# Altium PCB HU_SUPPORT_BOARD.PcbDoc (part 2 of 2)
Units mm, origin at the board's own origin, x right, y up, seen from the top; angles counter-clockwise.
Board outline 160 x 100 mm, 4 copper layers (Top Layer, Layer 1, Layer 2, Bottom Layer), stack 1.586 mm thick; 158 components, 113 nets, 591 pads, 28 vias.
Unrouted connection lines stored in the file: 303.
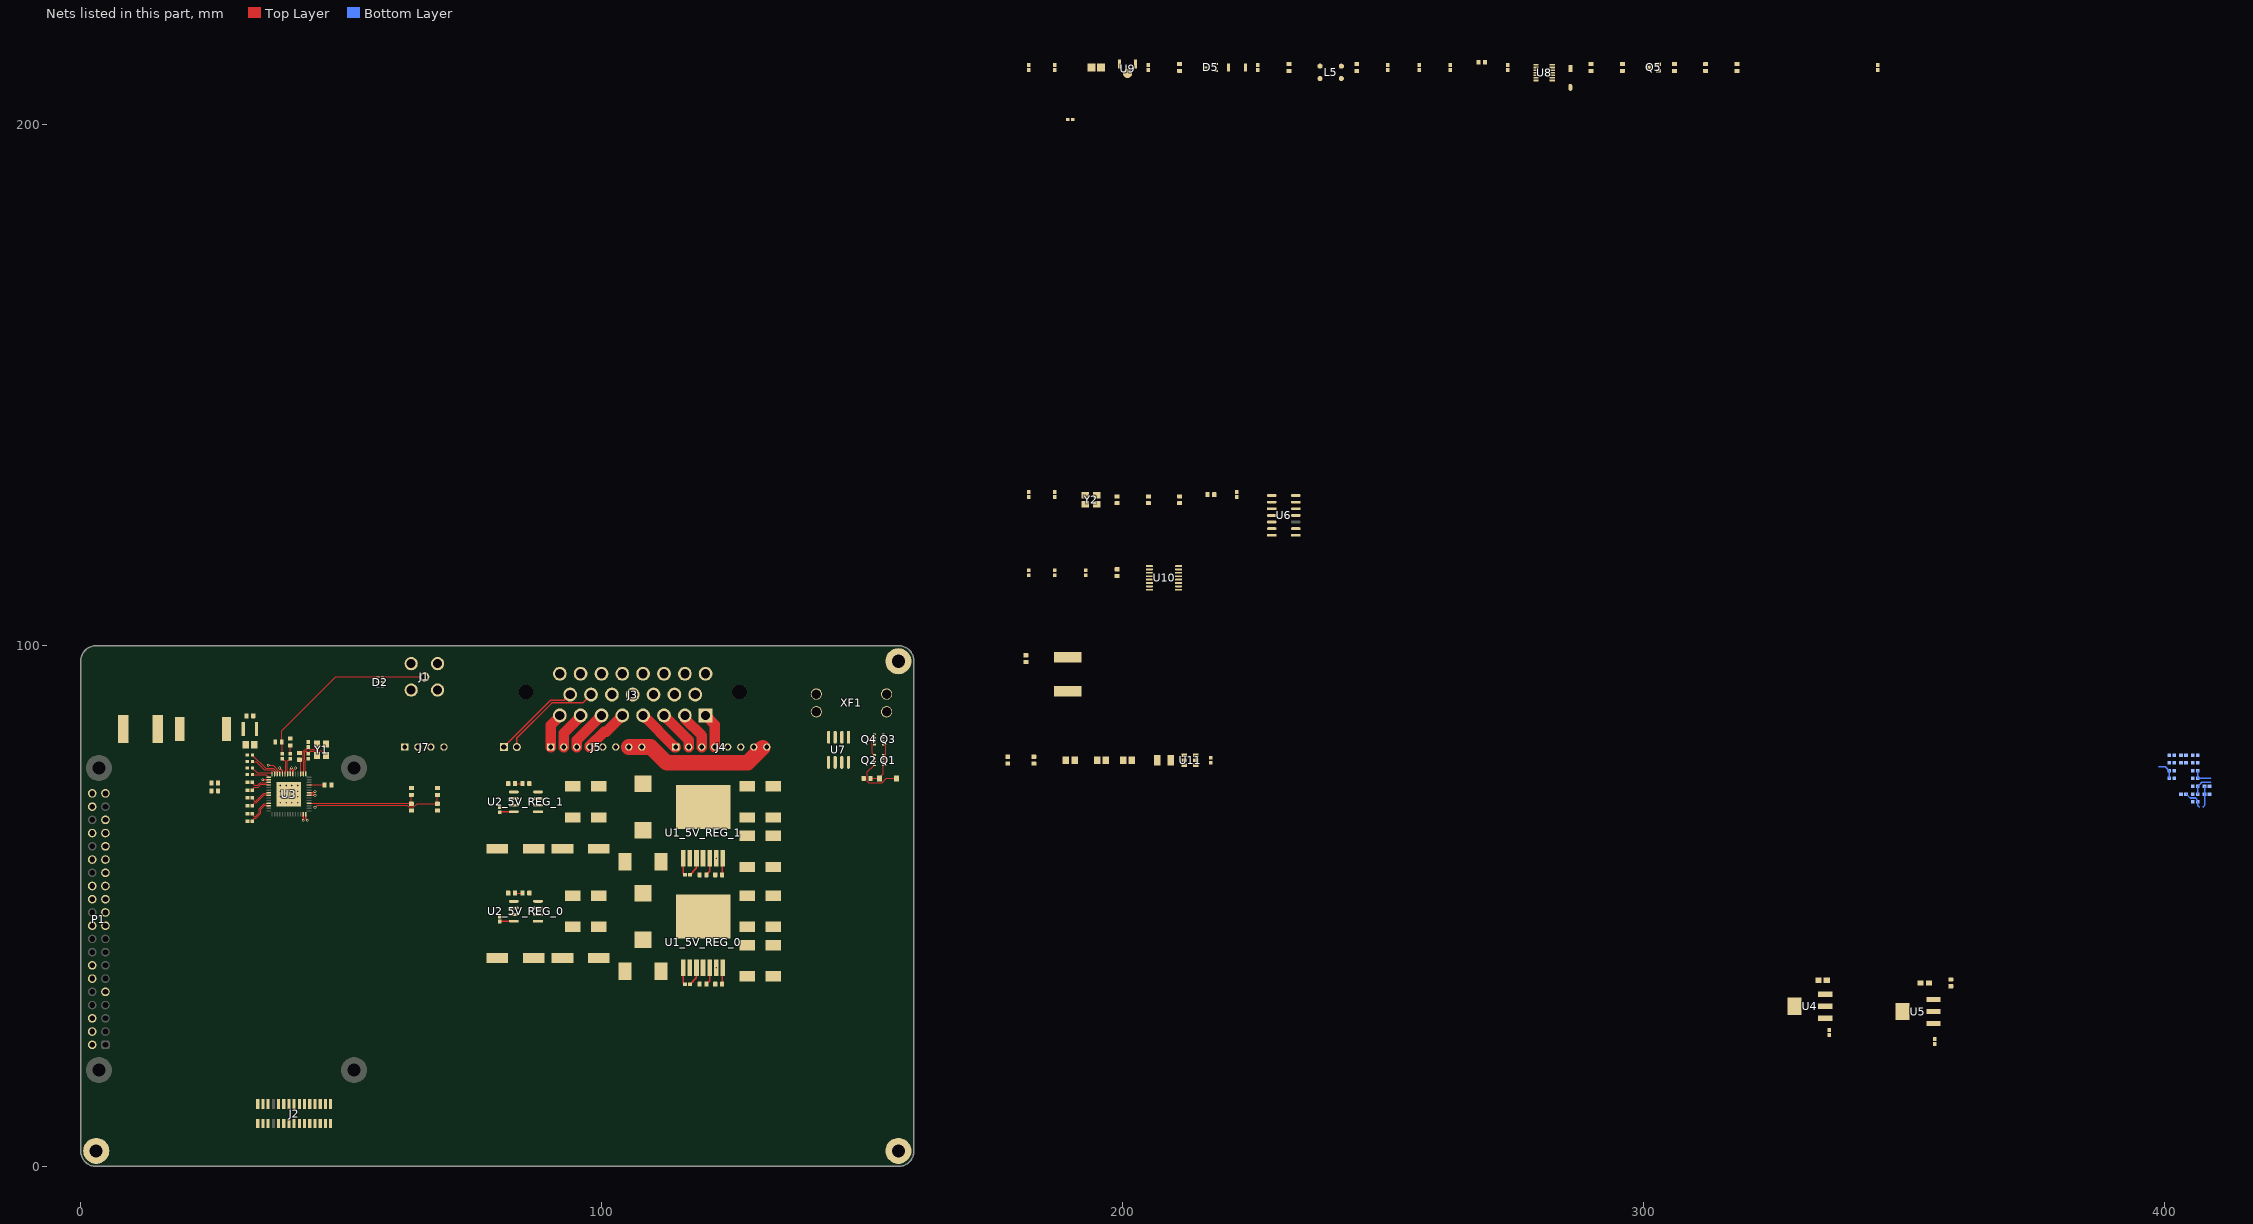
[diagram p2: the nets of this part, all layers, seen from the top]

## Part data (continued)
C22 C24: library part CMP-2006-02792-2, "Chip Multilayer Ceramic Capacitors for General Purpose, 0603, 10uF, X5R, 15%, 20%, 6.3V", Capacitance=10uF, Case Code (Imperial)=0603, Case Code (Metric)=1608, Dielectric=X5R, Max Operating Temperature=85°C, Min Operating Temperature=-55°C, Package Quantity=4000, Tolerance=20%, Voltage=6.3V, Case/Package=0603, Depth=0.8mm, Height=0.8mm, Lead Free="Lead Free", Length=1.6mm, Material=Ceramic, Mount="Surface Mount", Packaging="Tape and Reel", Radiation Hardening=No, REACH SVHC="No SVHC", Termination=SMD/SMT, Thickness=0.035inch, Voltage Rating=6.3V, Voltage Rating (DC)=6.3V, Width=0.031inch
C41 C59 C60 C61: library part CMP-2007-03222-3, "Chip Multilayer Ceramic Capacitors for General Purpose, 0805, 22uF, X5R, 15%, 20%, 25V", Capacitance=22uF, Case Code (Imperial)=0805, Case Code (Metric)=2012, Dielectric=X5R, Max Operating Temperature=85°C, Min Operating Temperature=-55°C, Package Quantity=3000, Resistor Type=Ceramic, Tolerance=20%, Voltage=25V, Case/Package=0805, Depth=1.25mm, Height=1.25mm, Lead Free="Lead Free", Length=2mm, Material=Ceramic, Mount="Surface Mount", Packaging="Tape and Reel", REACH SVHC="No SVHC", Termination=SMD/SMT, Thickness=0.057inch, Voltage Rating=25V, Voltage Rating (DC)=25V, Weight=0.000335oz, Width=1.25mm
C52: library part CMP-1036-04819-2, Manufacturer=Kemet, Part Number=C0805C225K9PACTU
D1_5V_REG_0 D1_5V_REG_1: library part CMP-2000-05097-3, "DIODE SCHOTTKY 40V 5A SMC", Capacitance=300pF, Forward Current=5A, Manufacturer="Diodes Inc.", Max Junction Temp=+150°C, Max Repetitive Reverse Voltage=40V, Max Surge Forward Current=100A, Package=SMC, Peak Reverse Current=0.5mA, Temperature="-55°C to +150°C", Temperature Range Low=-55°C, Automotive=No, Automotive Grade=NA, Category=Diode, ComponentLink2Description=Datasheet, ComponentLink2URL=https://www.diodes.com/assets/Datasheets/ds13012.pdf, Device Class L1="Discrete Semiconductors", Device Class L2=Diodes, Device Class L3="Schottky Diodes", Digikey Description="DIODE SCHOTTKY 40V 5A SMC", Footprint Url=https://www.diodes.com/assets/Package-Files/SMC.pdf, Height=2.5mm, Lead Free=Yes, Manufacturer Part Number=B540C-13-F, Mouser Description="Diode: Schottky rectifying; SMD; 40V; 5A; SMC; Package: reel, tape", Octopart=https://octopart.com/b540c-13-f-diodes+inc.-325873, Reverse Voltage=40V, RoHS=TRUE, Standoff Height=0.1mm, Temperature Range High=+150°C
D2: library part CMP-04989-000002-1, "4-CHANNEL LOW-CAPACITANCE SURGE", Ambient Temperature Range High=+125°C, Ambient Temperature Range Low=-40°C, Breakdown Voltage=5.5V, Capacitance=0.55pF, Clamping Voltage=11.5V, Manufacturer="Texas Instruments", Package=DQA0010A, Peak Pulse Current=5.5A, Peak Pulse Power=50W, Reverse Standoff Voltage=3.6V, Temperature="-40°C to +125°C", Automotive=No, Category=Diode, ComponentLink2Description=Datasheet, ComponentLink2URL=http://www.ti.com/lit/ds/symlink/esd204.pdf, Device Class L1="Circuit Protection", Device Class L2="TVS Diodes", Device Class L3=unset, Digikey Description="4-CHANNEL LOW-CAPACITANCE SURGE", Direction=Bidirectional, Height=0.55mm, Lead Free=Yes, Manufacturer Part Number=ESD204DQAR, Mouser Description="4-Channel Low-Capacitance Surge and ESD Protection Diode 10-USON -40 to 125", Number Of Channels=4, Octopart=https://octopart.com/esd204dqar-texas+instruments-89917476, RoHS=TRUE, Standoff Height=0mm, Temperature Range High=+125°C, Temperature Range Low=-40°C
D3: library part CMP-1060-00565-1, "Zener Voltage Regulator, 500 mW, 2-Pin SOD-123, Pb-Free, Tape and Reel", Manufacturer="On Semiconductor", ComponentLink1Description="Manufacturer URL", ComponentLink1URL=http://www.onsemi.com/, ComponentLink2Description=Datasheet, ComponentLink2URL=http://www.onsemi.com/pub_link/Collateral/MMSZ5221BT1-D.PDF, ComponentLink3Description="Package Specification", ComponentLink3URL=http://www.onsemi.com/pub_link/Collateral/425-04.PDF, DatasheetVersion="Rev. 12", Mounting Technology="Surface Mount", P Max (W)=0.5, PackageDescription="2-Pin SOD, Body 1.6 x 2.69 mm", PackageReference=SOD-123-2-425-04, PackageVersion="Rev. G, 10/2009", Packing="Tape and Reel", PartNumber=MMSZ5242BT1G, RoHS=Pb-Free, VZ Typ (V)=12
D4: library part CMP-2000-04993-2, "DIODE GEN PURP 100V 150MA SOD123", Average Rectified Current=150mA, Capacitance=4pF, Forward Voltage=1V, Max Forward Surge Current (Ifsm)=1A, Max Operating Temperature=150°C, Max Repetitive Reverse Voltage (Vrrm)=100V, Max Reverse Leakage Current=5uA, Max Surge Current=2A, Min Operating Temperature=-65°C, Package Quantity=3000, Power Dissipation=400mW, Current Rating=150mA, Element Configuration=Single, Forward Current=150mA, Height=1.2mm, Lead Free="Lead Free", Length=2.85mm, Max Reverse Voltage (DC)=100V, Mount="Surface Mount", Number of Pins=2, Output Current=150mA, Packaging="Tape and Reel", Peak Non-Repetitive Surge Current=2A, Polarity=Standard, Radiation Hardening=No, Recovery Time=4ns, Reverse Recovery Time=4ns, Voltage Rating (DC)=100V, Width=1.8mm
D5: library part CMP-12225-000055-1, "TVS DIODE 26.5V 44V SOT323-3", Breakdown Voltage=28.5V, Capacitance=3pF, Clamping Voltage=44V, Manufacturer=STMicroelectronics, Max Junction Temp=+175°C, Package=SOT323-3L, Peak Pulse Current=3A, Peak Pulse Power=170W, Reverse Standoff Voltage=26.5V, Temperature="-55°C to +175°C", Temperature Range Low=-55°C, Automotive=Yes, Automotive Grade="Grade 0", Category=Diode, ComponentLink2Description=Datasheet, ComponentLink2URL=https://www.st.com/resource/en/datasheet/esdcan02-2bwy.pdf, Device Class L1="Circuit Protection", Device Class L2="TVS Diodes", Device Class L3=unset, Digikey Description="TVS DIODE 26.5V 44V SOT323-3", Direction=Bidirectional, Height=1.1mm, Ipc Land Pattern Name=SOT65P210X95-3, Lead Free=Yes, Manufacturer Part Number=ESDCAN02-2BWY, Mouser Description="TVS Diodes / ESD Suppressors Automotive dual-line Transil, Transient voltage suppressor (TVS) for CAN bus", Number Of Channels=2, Octopart=https://octopart.com/esdcan02-2bwy-stmicroelectronics-58631133, RoHS=TRUE, Standoff Height=0mm, Temperature Range High=+175°C
F1 F2: library part CMP-08606-000071-1, "PTC RESET FUSE 60V 500MA 2920", Case Code (Imperial)=2920, Case Code (Metric)=7351, Current Rating=10A, Hold Current=500mA, Max Operating Temperature=85°C, Max Voltage Rating (DC)=60V, Min Operating Temperature=-40°C, Package Quantity=1500, Power Dissipation=1.5W, Resistance=1.4R, Trip Current=1A, Approvals=cULus, Case/Package=2920, Height=1.25mm, Lead Free="Lead Free", Length=7.98mm, Max Current Rating=10A, Operating Supply Voltage=60V, Packaging="Tape and Reel", REACH SVHC="No SVHC", RoHS Compliant=Yes, Series=2920L, Terminal Material=Copper, Termination=SMD/SMT, Time to Trip=4s, Voltage Rating=60V, Voltage Rating (DC)=60V, Width=5.44mm, Working Voltage=60V
J1: library part CMP-002-00054-1, "RF F Connector, Male, Board Mount, Solder Terminal, Plug", Connector Type="RF F CONNECTOR", Mounting Technology=Board, RoHS Compliant=Yes
J2: library part CMP-03368-000001-1, "CONN FPC VERT 15POS 1.00MM SMD", Current Rating=1A, Manufacturer=TE, Package=0, Temperature="-20°C to +85°C", Temperature Range High=+85°C, Temperature Range Low=-20°C, Voltage Rating=125V, Automotive=No, Category=Conn, ComponentLink2Description=Datasheet, ComponentLink2URL=https://www.te.com/commerce/DocumentDelivery/DDEController?Action=showdoc&DocId=Customer+Drawing%7F1734248%7FE1%7Fpdf%7FEnglish%7FENG_CD_1734248_E1__.pdf%7F1-1734248-5, Conn Gender=Female, Conn Orientation=Vertical, Contact Material=Gold,Nickel, Device Class L1=Connectors, Device Class L2="FFC / FPC", Device Class L3=unset, Digikey Description="CONN FPC VERT 15POS 1.00MM SMD", Height=8mm, Is Female=yes, Lead Free=Yes, Manufacturer Part Number=1-1734248-5, Mounting Type="Surface Mount", Mouser Description="FFC & FPC Connectors 15P 1.0 FPC, Zip V/T SMT", Number of Contacts=15, Octopart=https://octopart.com/1-1734248-5-te+connectivity-40620898, Pitch=1mm, RoHS=TRUE
J3: library part CMP-03369-000157-2, "CONN HEADER R/A 23POS 4MM", Color=Black, Current Rating=17A, Flammability Rating="UL94 V-0", Max Operating Temperature=221°C, Max Voltage Rating (AC)=250V, Min Operating Temperature=-40°C, Package Quantity=1, Circuit Application=Power, Connector System=Wire-to-Device, Connector Type=Header, Contact Finish - Mating=TIN, Contact Material=Brass, Contact Plating=Tin, Contact Shape=Circular, Contact Type="Male Pin", Depth=37.9mm, ELV=Compliant, Fastening Type=Ramp, Gender=Male, Housing Color=Black, Housing Material=Polybutylene, Insulation Color=Black, Insulation Material=PBT, Lead Free="Lead Free", Length=60.8mm, Mount="Through Hole", Number of Contacts=23, Number of Ports=1, Number of Positions=23, Number of Rows=3, Number of Signal Positions=23, Number of Terminals/Pins=23, Orientation="Right Angle", Packaging=Bulk, PCB Mount Alignment="Yes (With)", PCB Mount Retention=With, PCB Thickness=0.062inch, Pitch=0.157inch, Primary Type=Rectangular, Radiation Hardening=No, RoHS Compliant=Yes, Row Spacing=0.157inch, Sealable="Yes (With)", Series=Ampseal, Shielding=Unshielded, Tab Thickness=1.3mm, Termination=Solder, Voltage Rating (AC)=250V, Width=37.9mm
J4 J5: library part CMP-17438-000015-1, "CONN HEADER VERT 8POS 2.5MM", Color=Natural, Contact Resistance=20mR, Current Rating=3A, Housing Color=White, Insulation Resistance=1GR, Max Operating Temperature=85°C, Max Voltage Rating (AC)=250V, Min Operating Temperature=-25°C, Connector Type="Male Pin", Contact Material=Brass, Contact Plating=Tin, Contact Type="Male Pin", Depth=5.75mm, Fastening Type=Detent, Housing Material=Polyamide, Lead Free="Lead Free", Lead Pitch=2.5mm, Length=22.4mm, Max Current Rating=3A, Mount="Through Hole", Number of Contacts=8, Number of Positions=8, Number of Rows=1, Orientation=Straight, Packaging=Bulk, Pitch=2.5mm, REACH SVHC="No SVHC", Series=XH, Termination=Press-Fit, Voltage Rating=250V, Voltage Rating (AC)=250V, Wire/Cable Gauge=22AWG
J6: library part CMP-2000-05888-3, "CONN HEADER VERT 2POS 2.5MM", Color=Natural, Contact Resistance=20mR, Current Rating=3A, Housing Color=White, Insulation Resistance=1GR, Max Operating Temperature=85°C, Max Voltage Rating (AC)=250V, Min Operating Temperature=-25°C, Connector Type="Male Pin", Contact Material=Brass, Contact Plating=Tin, Contact Type="Male Pin", Depth=5.75mm, Fastening Type=Detent, Housing Material=Polyamide, Lead Free="Lead Free", Lead Pitch=2.5mm, Length=7.4mm, Max Current Rating=3A, Max Voltage Rating (DC)=250V, Mount="Through Hole", Number of Contacts=2, Number of Positions=2, Number of Rows=1, Orientation=Straight, Packaging=Bulk, Pitch=2.5mm, REACH SVHC="No SVHC", Series=XH, Termination=Solder, Voltage Rating=250V, Voltage Rating (AC)=250V, Wire/Cable Gauge=22AWG
J7: library part CMP-17439-000250-1, "CONN HEADER VERT 4POS 2.5MM", Color=Natural, Contact Resistance=20mR, Current Rating=3A, Flammability Rating="UL94 V-0", Housing Color=White, Insulation Resistance=1GR, Max Operating Temperature=85°C, Max Voltage Rating (AC)=250V, Min Operating Temperature=-25°C, Package Quantity=500, Connector Type=Header, Contact Finish - Mating=TIN, Contact Material=Brass, Contact Plating=Tin, Contact Shape=Square, Contact Type="Male Pin", Depth=5.75mm, Fastening Type=Detent, Gender=Male, Housing Material=Polyamide, Insulation Color=Natural, Insulation Material=Nylon, Lead Free="Lead Free", Lead Pitch=2.5mm, Length=12.4mm, Mated Stacking Heights=9.8mm, Material=Polyamide, Max Current Rating=3A, Max Voltage Rating (DC)=250V, Mount="Through Hole", Number of Contacts=4, Number of Positions=4, Number of Rows=1, Orientation=Straight, Packaging=Bulk, Pitch=2.5mm, REACH SVHC="No SVHC", Series=XH, Termination=Solder, Voltage Rating=250V, Voltage Rating (AC)=250V, Wire/Cable Gauge=22AWG
L1_5V_REG_0 L1_5V_REG_1: library part CMP-02424-000785-1, "Commercial Inductors, Low DCR Series 22uH 5A 66mΩ 20%", Case/Package=4040, Current Rating=5A, DC Resistance (DCR)=66mR, Inductance=22uH, Inductance Tolerance=20%, Max DC Current=4.5A, Max Operating Temperature=125°C, Min Operating Temperature=-55°C, Package Quantity=1, Self Resonant Frequency=1MHz, Test Frequency=100kHz, Contact Plating=Tin, Core Material=Metal, Depth=10.3mm, Height=4mm, Height - Seated (Max)=0.157inch, Lead Free="Lead Free", Length=0.43inch, Military Standard=Not, Mount="Surface Mount", Packaging="Tape and Reel", Radiation Hardening=No, Rated Current-Max=5A, RMS Current (Irms)=5A, RoHS Compliant=Yes, Saturation Current=4.5A, Series=IHLP-4040DZ-11, Shielding=Shielded, Termination=SMD/SMT, Tolerance=20%, Width=0.405inch
L2: library part CMP-0227-00094-3, Ambient Temperature Range High=95°C, Ambient Temperature Range Low=-40°C, Case/Package=Nonstandard, Current Rating=1.2A, DC Resistance (DCR)=255mΩ, Inductance=100µH, Inductance Tolerance=30%, Max Operating Temperature=125°C, Self Resonant Frequency=6MHz, Test Frequency=100kHz, Composition=Wirewound, Core Material=Ferrite, Depth=10mm, Height=3.8mm, Height - Seated (Max)=4.0894mm, Length=10mm, Max DC Current=1.2A, Min Operating Temperature=-40°C, Mount="Surface Mount", NexarPartId=8917123, Number of Pins=2, Packaging="Cut Tape (CT)", REACH SVHC=Unknown, Resistance=255mΩ, RMS Current (Irms)=1.2A, RoHS=Compliant, Saturation Current=1.2A, Shielding=Shielded, Termination=SMD/SMT, Tolerance=30%, Weight=1.273007g, Width=10mm
L3: library part CMP-11268-000041-1, "NOT COILCRAFT - ACTUAL P# --> ADL32VHC-220M /  - Power Injection Chokes for PoC", Ambient Temperature Range High=+125°C, Ambient Temperature Range Low=-40°C, Inductance=22uH, Manufacturer=coilcraft, Manufacturer Part Number=1210POC-223MRC, Package=1210POC, Rms Current=700mA, Saturation Current=720mA, Self Resonant Frequency=70MHz, Series Resistance=0.88Ω, Test Frequency=100kHz, Tolerance=20%, Automotive=Yes, Automotive Grade="Grade 1", Category=Ind, ComponentLink2Description=Datasheet, ComponentLink2URL=https://drive.google.com/open?id=15FlOq8Y4YbRFohfA_cJ40jgnqs8va2Mh, Core Material=Ferrite, Device Class L1="Passive Components", Device Class L2=Inductors, Device Class L3="Fixed Inductors", Height=3mm, Lead Free=Yes, Octopart=https://octopart.com/1210poc-223mrc-coilcraft-103207315, RoHS=TRUE
L4: library part CMP-11268-000007-1, "Fixed Inductors PFL1609 Low Profile 0.56 uH 20 % 1.4 A", Ambient Temperature Range High=+105°C, Ambient Temperature Range Low=-40°C, Inductance=0.56uH, Manufacturer=coilcraft, Package=PFL1609, Rms Current=1100mA, Saturation Current=710mA, Self Resonant Frequency=600MHz, Series Resistance=130mΩ, Test Frequency=7.9MHz, Tolerance=20%, Automotive=Yes, Automotive Grade="Grade 1", Category=Ind, ComponentLink2Description=Datasheet, ComponentLink2URL=https://www.coilcraft.com/pdfs/pfl1609.pdf, Composition=Wirewound, Core Material=Composite, Device Class L1="Passive Components", Device Class L2=Inductors, Device Class L3="Fixed Inductors", Height=0.95mm, Lead Free=Yes, Manufacturer Part Number=PFL1609-561MEW, Mouser Description="Fixed Inductors PFL1609 Low Profile 0.56 uH 20 % 1.4 A", Octopart=https://octopart.com/pfl1609-561mew-coilcraft-20329171, RoHS=TRUE, Shielding=true
L5: library part CMP-07251-000006-1, "CMC 51UH 200MA 2LN 2KOHM SMD", Case/Package=4532, Current=200mA, DC Resistance (DCR)=3.5R, Inductance=51uH, Insulation Resistance=10MR, Max Operating Temperature=125°C, Min Operating Temperature=-40°C, Package Quantity=1, Resistance=2kR, Self Resonant Frequency=100kHz, Tolerance=50%, Voltage Rating (DC)=50V, Contact Plating=Tin, Core Material=Ferrite, Current Rating=200mA, DC Current=200mA, Depth=3.4mm, Element Configuration=Dual, Height=0.118inch, Impedance=2kR, Lead Free="Lead Free", Length=4.5mm, Material=Steel, Max DC Current=200mA, Mount="Surface Mount", Number of Lines=2, Packaging="Tape and Reel", REACH SVHC="No SVHC", RoHS Compliant=Yes, Series=SRF4532, Termination=SMD/SMT, Test Frequency=100kHz, Width=0.126inch
L6: library part CMP-06042-015002-1, "Wire Wound Ferrite Inductor for Power Lines 4.7μH ±30% 0.216Ω 1000mA 1210", Case Code (Imperial)=1210, Case Code (Metric)=3225, Current Rating=1A, DC Resistance (DCR)=180mR, Inductance=4.7uH, Inductance Tolerance=30%, Max Operating Temperature=85°C, Min Operating Temperature=-40°C, Package Quantity=2000, Resistor Type=Wirewound, Self Resonant Frequency=40MHz, Test Frequency=1MHz, Case/Package=1210, Core Material=Ferrite, DC Current=1A, Depth=2.8mm, Height=2mm, Height - Seated (Max)=0.067inch, Lead Free="Lead Free", Length=3.2mm, Max DC Current=1A, Military Standard=Not, Mount="Surface Mount", Packaging="Tape and Reel", Radiation Hardening=No, REACH SVHC="No SVHC", Saturation Current=1A, Shielding=Shielded, Termination=SMD/SMT, Tolerance=30%, Weight=0.001552oz, Width=0.098inch
P1: library part CMP-1502-01135-3, Color=Black, Contact Resistance=20mΩ, Current Rating=3A, Max Operating Temperature=105°C, Min Operating Temperature=-40°C, Operating Supply Voltage=250V, Connector Type="Male Pin", Contact Material=Copper, Contact Mating Length=5.9944mm, Contact Plating=Gold, Gender=Male, Height=8.89mm, Lead Pitch=2.54mm, Mount="Through Hole", NexarPartId=32855579, Number of Contacts=40, Number of Pins=40, Number of Positions=40, Number of Rows=2, Orientation=Vertical, Packaging=Bulk, Pitch=2.54mm, REACH SVHC=Unknown, RoHS=Compliant, Row Spacing=2.54mm, Termination=Solder, Voltage Rating=250V
Q1 Q2 Q3 Q4: library part CMP-013-00018-2, "Trans MOSFET P-CH 20V 22.1A 8-Pin PowerPAK 1212 EP T/R", Component Type=Standard, Design Item ID=CMP-013-00036-4, Pins=5, Source=SISH615ADN-T1-GE3.SchLib
Q5: library part CMP-2000-05968-1, "N-Channel Enhancement Mode Mosfet, 50 V, 200 mA, -55 to 150 degC, 6-Pin SOT-323, RoHS, Tape and Reel", Id - Continuous Drain Current=200mA, Manufacturer=DiodesIncorporated, Maximum Operating Temperature=+150C, Minimum Operating Temperature=-55C, Package / Case=SOT-323-3, Package Description="3-Pin Small Outline Transistor, Body 2 x 1.25 mm, Pitch 0.65 mm", Package Reference=SOT323, Pd - Power Dissipation=200mW, Rds On - Drain-Source Resistance=1.4Ohms, Vds - Drain-Source Breakdown Voltage=75V, Vgs - Gate-Source Voltage=20V, Brand=DiodesIncorporated, Channel Mode=Enhancement, Configuration=Single, Datasheet URL=http://www.diodes.com/_files/datasheets/ds30206.pdf, Datasheet Version="Rev. 11-2, 09/2013", Factory Pack Quantity=3000, Forward Transconductance - Min=0.1S, Height=1mm, Length=2.2mm, Manufacturer URL=http://www.diodes.com/, Mounting Style=SMD/SMT, Mounting Technology=SurfaceMount, Number Of Channels=1Channel, Packaging=Reel, Product=MOSFETSmallSignal, Product Category=MOSFET, RoHS=True, Series=BSS138, Technology=Si, Transistor Polarity=N-Channel, Transistor Type=1N-Channel, Type=EnhancementModeFieldEffectTransistor, Typical Turn-Off Delay Time=20ns, Typical Turn-On Delay Time=20ns, Unit Weight=0.000212oz, Width=1.35mm
R1 R8 R9 R11 R12: library part CMP-009-00118-2, "READ THE NAME", Component Type=Standard, Design Item ID=CMP-009-00206-2, Pins=2, Source=0402jump.SchLib
R2_5V_REG_0 R2_5V_REG_1 R3_5V_REG_0 R3_5V_REG_1 R4_5V_REG_0 R4_5V_REG_1 R5_5V_REG_0 R5_5V_REG_1 R6 R7 R10 R13 R14 R15 R16 R17 R18 R19 R20 R21 R22 R23 R24 R25 R26 R27 R28 R29 R30 R31 R32 R33 R34 R35 R36 R37 R38: library part CMP-009-00002-14, "Resistor"
SW1: library part CMP-10040-000029-1, "SWITCH TACTILE SPST-NO 0.02A 15V", Current Rating=5A, Flammability Rating="UL94 V-0", Insulation Color=Black, Max Operating Temperature=85°C, Min Operating Temperature=-40°C, Operating Force=240gf, Actuator Type=Standard, Connector Type=USB, Contact Plating=Gold, Gender=Receptacle, Illumination Type=Non-Illuminated, Mechanical Life=500000Cycles, Mount="Surface Mount", Number of Contacts=24, Number of Ports=1, Packaging="Tape and Reel", Switch Function=Off-Mom, Switch Travel=0.13mm, Termination=Solder, Throw Configuration=SPST
U1_5V_REG_0 U1_5V_REG_1: library part CMP-0069-00189-3, "SIMPLE SWITCHER® High Efficiency 5A Step-Down Voltage Regulator, 7-pin TO-263, Pb-Free", Manufacturer="Texas Instruments", PackageTopMarking=NSUZXYTTE#*LM2678*S-5.0, PowerWise=N, Code_JEDEC=MO-169-AC, ComponentLink1Description="Datasheet URL", ComponentLink1URL=http://www.ti.com/general/docs/lit/getliterature.tsp?genericPartNumber=LM2678&fileType=pdf, CompType=Switcher, PackageDescription="TO-263, Molded, .400 x .390 x .180in Body, 7 Lead, .050in Pitch, Surface Mount", PackageReference=KTW0007B, PinCount=7, RoHS=Y
U2_5V_REG_0 U2_5V_REG_1: library part CMP-1557-00012-2, "SENSOR CURRENT HALL 12.5A AC/DC", Case/Package=SOIC, Current Sensing=12.5A, Frequency=100kHz, Max Operating Temperature=125°C, Max Supply Current=5.5mA, Max Supply Voltage=5.5V, Min Operating Temperature=-40°C, Min Supply Voltage=3V, Operating Supply Voltage=3.3V, Package Quantity=1, Quiescent Current=4mA, -3db Bandwidth=100kHz, Accuracy=5%, Bandwidth=100kHz, Height=1.5mm, Length=4.9mm, Linearity=1%, Number Of Channels=1, Number of Pins=8, Packaging="Tape and Reel", Polarity=Bidirectional, REACH SVHC="No SVHC", Response Time=4.6us, RoHS Compliant=Yes, Sensitivity=110mV/A, Series=-, Width=3.9mm
U3: library part CMP-015-00011-3, "Quad Tunneling GMSL2/1 to CSI-2 Deserializer"
U4: library part CMP-0244-00308-1, "Fixed Low Drop Positive Voltage Regulator, 1.8V, 4-Pin SOT-223, Tape and Reel", ComponentLink1Description="Manufacturer URL", ComponentLink1URL=http://www.st.com, ComponentLink2Description=Datasheet, ComponentLink2URL=http://www.st.com/internet/com/TECHNICAL_RESOURCES/TECHNICAL_LITERATURE/DATASHEET/CD00000544.pdf, DatasheetVersion=1/11/2011, PackageDescription="4-Pin SOT-223 Package, 6.5 x 3.5 mm Body, 2.3 mm Pitch, 7 mm Lead Span", PackageReference=SOT-223, PackageVersion=2010
U5: library part CMP-0244-00318-1, "Fixed Low Drop Positive Voltage Regulator, 1.2V, 4-Pin SOT-223, Tape and Reel", ComponentLink1Description="Manufacturer URL", ComponentLink1URL=http://www.st.com, ComponentLink2Description=Datasheet, ComponentLink2URL=http://www.st.com/internet/com/TECHNICAL_RESOURCES/TECHNICAL_LITERATURE/DATASHEET/CD00000544.pdf, DatasheetVersion=1/11/2011, PackageDescription="4-Pin SOT-223 Package, 6.5 x 3.5 mm Body, 2.3 mm Pitch, 7 mm Lead Span", PackageReference=SOT-223, PackageVersion=2010
U6: library part CMP-06298-000019-1, "IC CAN CONTROLLER SPI 14SOIC", RoHS Compliant=Yes
U7: library part CMP-1557-00015-2, "SENSOR CURRENT HALL 25A AC/DC", Case/Package=SOIC, Current Sensing=25A, Frequency=100kHz, Max Operating Temperature=125°C, Max Supply Current=5.5mA, Max Supply Voltage=5.5V, Min Operating Temperature=-40°C, Min Supply Voltage=3V, Operating Supply Voltage=3.3V, Package Quantity=1, Quiescent Current=4mA, -3db Bandwidth=100kHz, Accuracy=4%, Bandwidth=100kHz, Height=1.5mm, Length=4.9mm, Linearity=1%, Number Of Channels=1, Number of Pins=8, Packaging="Tape and Reel", Polarity=Bidirectional, REACH SVHC="No SVHC", Response Time=4.6us, RoHS Compliant=Yes, Sensitivity=55mV/A, Series=-, Width=3.9mm
U8: library part CMP-318-000000-2, "Automotive CAN FD transceiver with watchdog, bus diagnostics and partial networking via sele 14-SOT-23-THIN -40 to 150", Component Type=Standard, Design Item ID=CMP-015-00012-2, Pin Count=14, Source=TCAN1146DYYRQ1.SchLib
U9: library part CMP-12756-000009-1, "IC REG LINEAR 5V 150MA SOT89", Ambient Temperature Range High=+85°C, Ambient Temperature Range Low=-40°C, Dropout Voltage=1000mV, Manufacturer="Diodes Inc.", Max Junction Temp=+125°C, Max Supply Voltage=40V, Min Supply Voltage=3.3V, Nominal Supply Current=2.5-25uA, Output Current=150mA, Output Voltage=5V, Package=SOT89, Temperature="-40°C to +125°C", Automotive=No, Category=IC, ComponentLink2Description=Datasheet, ComponentLink2URL=https://www.diodes.com/assets/Datasheets/AP7381.pdf, Device Class L1="Integrated Circuits (ICs)", Device Class L2="Power Management ICs", Device Class L3="Voltage Regulators - Linear", Digikey Description="IC REG LINEAR 5V 150MA SOT89", Footprint Url=https://www.diodes.com/assets/Package-Files/SOT89.pdf, Height=1.6mm, Lead Free=Yes, Manufacturer Part Number=AP7381-50Y-13, Number Of Outputs=1, Octopart=https://octopart.com/ap7381-50y-13-diodes+inc.-87775116, Output Type=Fixed, RoHS=TRUE, Temperature Range High=+125°C, Temperature Range Low=-40°C
U10: library part CMP-0054-00372-2, "8-Channel, 50 kSPS to 200 kSPS, 8-Bit A/D Converter, 16-pin TSSOP, Pb-Free", Manufacturer="National Semiconductor", PackageTopMarking=NSUZXYTT*88S022*CIMT, PowerWise=Y, Code_JEDEC=MO-153-AB, ComponentLink1Description="ADC088S022 Datasheet", ComponentLink1URL=http://www.national.com/ds/AD/ADC088S022.pdf, ComponentLink2Description="ADC088S022 Web Page", ComponentLink2URL=http://www.national.com/pf/AD/ADC088S022.html, ComponentLink3Description="MTC16 Package Page", ComponentLink3URL=http://www.national.com/packaging/folders/mtc16.html, CompType="ADC IC", DatasheetVersion=Feb-2010, PackageDescription="Molded TSSOP, Jedec, 5 x 4.4 x 0.9mm Body, 16 Lead, 0.65mm Pitch", PackageReference=MTC16, PackageVersion="revD, Jun-2003", PinCount=16, RevisionNote="Component URLs added", RoHS=Y
U11: library part CMP-12757-000006-1, "IC REG BUCK 3.3V 2A TSOT26", Ambient Temperature Range High=+85°C, Ambient Temperature Range Low=-40°C, Manufacturer="Diodes Inc.", Max Junction Temp=+160°C, Max Supply Voltage=32V, Min Supply Voltage=3.8V, Nominal Supply Current=22uA, Output Current=2A, Output Voltage=3.3V, Package=TSOT26, Switching Frequency=1.1MHz, Temperature="to +160°C", Automotive=No, Category=IC, ComponentLink2Description=Datasheet, ComponentLink2URL=https://www.diodes.com/assets/Datasheets/AP63200-AP63201-AP63203-AP63205.pdf, Device Class L1="Integrated Circuits (ICs)", Device Class L2="Power Management ICs", Device Class L3="Voltage Regulators - Switching", Digikey Description="IC REG BUCK 3.3V 2A TSOT26", Footprint Url=https://www.diodes.com/assets/Package-Files/TSOT26.pdf, Height=1mm, Lead Free=Yes, Manufacturer Part Number=AP63203WU-7, Mouser Description="AP63203 Series 3.3 V 2 A SMT Fixed Low IQ Synchronous Buck - TSOT-26", Number Of Outputs=1, Octopart=https://octopart.com/ap63203wu-7-diodes+inc.-98099550, Output Type=Fixed, RoHS=TRUE, Standoff Height=0.01mm, Switching Topology=Buck, Temperature Range High=+160°C
XF1: library part CMP-2000-05461-1, "FUSE HOLDER, PCB MOUNT, 500VAC, 20A, ROHS", Current Rating=30A, Manufacturer=Keystone-Electronics, Voltage=500V, Category=CircuitProtection, Contact Finish=TinNickel, Contact Material=Brass, Datasheet URL=http://datasheet.octopart.com/3557-2-Keystone-datasheet-15715937.pdf, Datasheet Version=Apr-13, Family=Fuseholders, For Use With/Related Products=ATC,ATO257,MINI897, Fuse Size="0.43\"Lx0.15\"Wx0.64\"H(10.92mmx3.81mmx16.25mm)", Fuse Type=Blade, Fuseholder Type=Block, Manufacturer URL=http://www.keyelco.com/, Mounting Type=PCB, Number of Circuits=1, Orientation=Vertical, Series=-, Termination Style=PCPin
Y1: library part CMP-2000-05733-3, "Crystal 25MHz ±20ppm (Tol) ±30ppm (Stability) 18pF FUND 60Ω 4-Pin SMD T/R", Case/Package=CSMD, ESR (Equivalent Series Resistance)=60R, Frequency=25MHz, Frequency Stability=30ppm, Frequency Tolerance=20ppm, Load Capacitance=18pF, Max Operating Temperature=85°C, Min Operating Temperature=-40°C, Operating Frequency="25 MHz", Package Quantity=1000, Depth=2.5mm, Height=0.039inch, Lead Free="Lead Free", Length=3.2mm, Mount="Surface Mount", Number of Pins=4, Packaging="Tape and Reel", Radiation Hardening=No, Series=ABM8G, Series Resistance=60R, Termination=SMD/SMT, Tolerance=20ppm, Width=0.098inch
Y2: library part CMP-27762-015817-1, "Crystal 20MHz ±20ppm (Tol) ±30ppm (Stability) 18pF FUND 80Ω 4-Pin SMD T/R", Case/Package=CSMD, ESR (Equivalent Series Resistance)=80R, Frequency=20MHz, Frequency Stability=30ppm, Frequency Tolerance=20ppm, Load Capacitance=18pF, Max Operating Temperature=85°C, Min Operating Temperature=-40°C, Package Quantity=1000, Depth=2.5mm, Height=1mm, Length=3.2mm, Mount="Surface Mount", Number of Pins=4, Packaging="Tape and Reel", Series=ABM8G, Termination=SMD/SMT, Tolerance=20ppm, Width=2.5mm

## Free pads (board coordinates)
  round 5 hole 2.5: 29(3,3) 29(3.5,18.5) 29(3.5,76.5) 29(52.5,18.5) 29(52.5,76.5) 29(157,3) 29(157,97)

## Via types
v1: diameter 0.5, hole 0.3, Top Layer to Bottom Layer, 16 vias
v2: diameter 0.5, hole 0.3, Top Layer to Bottom Layer, tented both sides, 12 vias

## Nets (pads, with @x,y where several pads share a name; then routed paths per layer and width w, separated by ;. In a path a pad name is that pad's centre, name@x,y a point inside that pad or via, vN(x,y) a via of type N, cw(c..) or ccw(c..) an arc to the next point about the centre after c; other vN are vias at no path point)
3V3: C10_5V_REG_0.2 C10_5V_REG_1.2 C21.2 C23.2 C42.1 C45.1 C47.1 C55.1 C60.2 C61.2 L6.2 R1.2 R2_5V_REG_0.2 R6.2 R7.2 R13.2 R15.2 R16.2 R21.1 R22.1 R23.1 R35.1 R36.2 U2_5V_REG_0.8 U2_5V_REG_1.8 U4.3 U5.3 U6.14 U7.8 U8.5 U10.2 U11.1 | length 5.4
  Top Layer w0.3: C10_5V_REG_0.2@80.5,47.021 80.574,47.095 U2_5V_REG_0.8@83.184,47.095 ; C10_5V_REG_1.2@80.5,68.021 80.574,68.095 U2_5V_REG_1.8@83.184,68.095
5V_FB_5V_REG_0: C6_5V_REG_0.2 C7_5V_REG_0.2 C8_5V_REG_0.2 C9_5V_REG_0.2 L1_5V_REG_0.2 U1_5V_REG_0.6 U2_5V_REG_0.1 U2_5V_REG_0.2
  other v2: 122.04,38.15
5V_FB_5V_REG_1: C6_5V_REG_1.2 C7_5V_REG_1.2 C8_5V_REG_1.2 C9_5V_REG_1.2 L1_5V_REG_1.2 U1_5V_REG_1.6 U2_5V_REG_1.1 U2_5V_REG_1.2
  other v2: 122.04,59.15
5VA: P1.2 P1.4 R4_5V_REG_0.2 U2_5V_REG_0.3 U2_5V_REG_0.4
5VB: F2.2 R4_5V_REG_1.2 U2_5V_REG_1.3 U2_5V_REG_1.4
5VB_LL_EN: P1.27 R1.1 R2_5V_REG_1.2
ADC_MISO: P1.35 U10.15
ADC_MOSI: P1.38 U10.14
ADC_nCS: P1.12 U10.1
ADC_SCLK: P1.40 U10.16
CAM_1V2: C24.1 C29.2 C30.2 C31.2 C32.2 C39.2 C40.2 R19.1 U3.30 U3.55 U3.56 U5.2 U5.4 | length 15.6
  Top Layer w0.3: v2(35,74.25) U3.30@36.125,74.25 ; v2(42.75,66.5) U3.55@42.75,67.625 ; U3.56@43.25,67.625 43.25,66.768 43.5,66.518 v2(43.5,66.5)
  Bottom Layer w0.3: 399,76.75 400.25,76.75 401,76 C40.2@401.021,76 C39.2@401.021,74.5 ; C29.2@404.229,71.5 404.25,71.5 405,70.75 406.095,70.75 406.271,70.574 406.271,70.186 406.457,70 C30.2@406.479,70 406.479,69.271 406.75,69 ; 407.5,69 407.5,69.054 407.771,69.326 C32.2@407.771,71.5 C31.2@407.771,73
CAM_1V8: C22.1 C33.2 C34.2 C35.2 C36.2 U3.7 U3.21 U4.2 U4.4 | length 6.7
  Top Layer w0.3: U3.21@40.25,75.375 40.25,76.246 40.486,76.482 v2(40.486,76.514) ; U3.7@43.875,71.25 v2(45,71.25)
  Bottom Layer w0.3: C33.2@406.479,71.5 C34.2@406.479,73 406.5,73 406.686,73.186 406.686,73.208 407.229,73.75 409,73.75
CAM_I2C_SCL: J2.13 R7.1 R11.1 R12.1
CAM_I2C_SDA: J2.14 R6.1 R8.1 R9.1
CAM_nPWDN: J2.11 R13.1 U3.11 | length 3
  Top Layer w0.2: U3.11@43.875,73.25 R13.1@46.85,73.25
CAN_INH: R28.1 U8.7
CAN_MISO: P1.21 U6.12 U8.6
CAN_MOSI: P1.19 U6.11 U8.11
CAN_N: C49.1 D5.1 J3.19 L5.4 R33.2
CAN_nCS: P1.26 U8.14
CAN_P: C51.2 D5.2 J3.18 L5.1 R34.1
CAN_RX: U6.2 U8.4
CAN_SCLK: P1.23 U6.10 U8.8
CAN_TX: U6.1 U8.1
CFG0: R16.1 R18.2 U3.4 | length 21.4
  Top Layer w0.2: U3.4@43.875,69.75 63.4,69.75 R18.2@63.5,69.65 63.5,69.75 R16.1@63.5,71.35
CFG1: R15.1 R17.2 U3.25 | length 28.9
  Top Layer w0.2: v2(36,77) 36.975,77 38.25,75.725 U3.25@38.25,75.375 ; v2(45,69) 45.4,69.4 62.648,69.4 63,69.048 64,69.048 64.602,69.65 R17.2@68.5,69.65 R15.1@68.5,71.35
CKA_N: C16.1 U3.40 | length 5.1
  Top Layer w0.2: C16.1@32.979,66.25 33,66.25 33.236,66.486 33.236,66.732 33.353,66.849 33.644,66.849 34.604,67.809 34.604,68.603 35.35,69.349 35.662,69.349 35.761,69.25 U3.40@36.125,69.25
CKA_P: C15.1 U3.39 | length 5.1
  Top Layer w0.2: C15.1@32.979,67.75 33,67.75 33.236,67.514 33.236,67.268 33.353,67.151 33.519,67.151 34.302,67.934 34.302,68.728 35.225,69.651 35.662,69.651 35.761,69.75 U3.39@36.125,69.75
CSI_CLK_N: C16.2 J2.8
CSI_CLK_P: C15.2 J2.9
CSI_D0_N: C12.2 J2.2
CSI_D0_P: C11.2 J2.3
CSI_D1_N: C14.2 J2.5
CSI_D1_P: C13.2 J2.6
DA0_N: C12.1 U3.32 | length 3.8
  Top Layer w0.2: C12.1@32.979,72.25 33,72.25 33.236,72.486 33.236,72.732 33.353,72.849 34.13,72.849 34.63,73.349 35.662,73.349 35.761,73.25 U3.32@36.125,73.25
DA0_P: C11.1 U3.31 | length 3.8
  Top Layer w0.2: C11.1@32.979,73.75 33,73.75 33.236,73.514 33.236,73.268 33.353,73.151 34.005,73.151 34.505,73.651 35.662,73.651 35.761,73.75 U3.31@36.125,73.75
DA1_N: C14.1 U3.36 | length 4.2
  Top Layer w0.2: C14.1@32.979,69.25 33,69.25 33.236,69.486 33.236,69.732 33.353,69.849 33.761,69.849 35.261,71.349 35.662,71.349 35.761,71.25 U3.36@36.125,71.25
DA1_P: C13.1 U3.35 | length 4.2
  Top Layer w0.2: C13.1@32.979,70.75 33,70.75 33.236,70.514 33.236,70.268 33.353,70.151 33.636,70.151 35.136,71.651 35.662,71.651 35.761,71.75 U3.35@36.125,71.75
FL+: J3.1 J4.4 | length 6.8
  Top Layer w2: J3.1@120,86.6 121.75,84.85 J4.4@121.75,80.525
FL-: J3.2 J4.3 | length 7.4
  Top Layer w2: J3.2@116,86.6 116.124,86.476 116.124,85.876 119.25,82.75 J4.3@119.25,80.525
FR+: J3.3 J4.2 | length 8
  Top Layer w2: J3.3@112,86.6 116.75,81.85 J4.2@116.75,80.525
FR-: J3.4 J4.1 | length 8.8
  Top Layer w2: J3.4@108,86.6 114.075,80.525 J4.1@114.25,80.525
GND: C2_5V_REG_0.1 C2_5V_REG_1.1 C3_5V_REG_0.1 C3_5V_REG_1.1 C4_5V_REG_0.1 C4_5V_REG_1.1 C5_5V_REG_0.1 C5_5V_REG_1.1 C6_5V_REG_0.1 C6_5V_REG_1.1 C7_5V_REG_0.1 C7_5V_REG_1.1 C8_5V_REG_0.1 C8_5V_REG_1.1 C9_5V_REG_0.1 C9_5V_REG_1.1 C10_5V_REG_0.1 C10_5V_REG_1.1 C19.1 C20.1 C21.1 C22.2 C23.1 C24.2 C25.1 C26.1 C27.1 C28.1 C29.1 C30.1 C31.1 C32.1 C33.1 C34.1 C35.1 C36.1 C37.1 C38.1 C39.1 C40.1 C41.2 C42.2 C43.2 C44.2 C45.2 C46.2 C47.2 C48.2 C49.2 C50.2 C51.1 C52.1 C53.2 C54.1 C55.2 C56.2 C57.2 C59.1 C60.1 C61.1 D1_5V_REG_0.2 D1_5V_REG_1.2 D2.3 D2.8 D5.3 J1.2 J2.1 J2.4 J2.7 J2.10 J3.9 J3.10 J3.11 J3.12 J3.13 J3.21 J4.5 J4.6 J5.5 J5.6 J7.2 P1.6 P1.9 P1.14 P1.20 P1.25 P1.30 P1.34 P1.39 pad.29@3,3 pad.29@157,3 pad.29@157,97 Q5.2 R3_5V_REG_0.2 R3_5V_REG_1.2 R5_5V_REG_0.1 R5_5V_REG_1.1 R10.1 R14.1 R17.1 R18.1 R19.2 R25.1 R29.1 R30.1 R37.1 SW1.1 U1_5V_REG_0.4 U1_5V_REG_0.8 U1_5V_REG_1.4 U1_5V_REG_1.8 U2_5V_REG_0.5 U2_5V_REG_1.5 U3.57 U4.1 U5.1 U6.7 U7.5 U8.2 U9.2 U10.3 U10.12 U11.4 Y1.2 Y1.4 Y2.2 Y2.4
  other v1: 38.35,69.85 39.45,69.85 40.55,69.85 41.65,69.85 38.35,70.95 39.45,70.95 40.55,70.95 41.65,70.95 38.35,72.05 39.45,72.05 40.55,72.05 41.65,72.05 38.35,73.15 39.45,73.15 40.55,73.15 41.65,73.15
MCP2518_nCS: P1.24 U6.13
MCP2518_nINT: P1.29 R21.2 U6.4
MCP2518_nINT0: P1.31 R22.2 U6.9
MCP2518_nINT1: P1.33 R23.2 U6.8
MIC+: J3.15 J6.1 | length 16.9
  Top Layer w0.3: J6.1@81.25,80.525 90.225,89.5 92.838,89.5 93.938,90.6 J3.15@94,90.6
MIC-: J3.14 J6.2 | length 19.4
  Top Layer w0.3: J6.2@83.75,80.525 83.75,82.25 90.5,89 96.4,89 J3.14@98,90.6
NetC1_5V_REG_0_1: C1_5V_REG_0.1 U1_5V_REG_0.3 | length 3.7
  Top Layer w0.254: C1_5V_REG_0.1@116.979,35 117,35 118.23,36.23 U1_5V_REG_0.3@118.23,38.15
NetC1_5V_REG_0_2: C1_5V_REG_0.2 D1_5V_REG_0.1 L1_5V_REG_0.1 U1_5V_REG_0.1 | length 3.3
  Top Layer w0.254: U1_5V_REG_0.1@115.69,38.15 115.69,35.31 116,35 C1_5V_REG_0.2@116.021,35
NetC1_5V_REG_1_1: C1_5V_REG_1.1 U1_5V_REG_1.3 | length 3.7
  Top Layer w0.254: C1_5V_REG_1.1@116.979,56 117,56 118.23,57.23 U1_5V_REG_1.3@118.23,59.15
NetC1_5V_REG_1_2: C1_5V_REG_1.2 D1_5V_REG_1.1 L1_5V_REG_1.1 U1_5V_REG_1.1 | length 3.3
  Top Layer w0.254: U1_5V_REG_1.1@115.69,59.15 115.69,56.31 116,56 C1_5V_REG_1.2@116.021,56
NetC18_2: C18.2 R14.2 | length 1.6
  Top Layer w0.2: C18.2@40.25,79.229 R14.2@40.25,80.85
NetC25_2: C25.2 C26.2 U3.8 | length 5.2
  Top Layer w0.3: U3.8@43.875,71.75 44.732,71.75 44.982,72 v2(45,72)
  Bottom Layer w0.3: C25.2@406.479,76 C26.2@406.479,74.5 409,74.5
NetC27_2: C27.2 C28.2 U3.20 | length 1.3
  Top Layer w0.3: U3.20@40.75,75.375 40.75,76 v2(41.25,76.5)
NetC41_1: C41.1 L2.2 L3.1 R20.2
NetC48_1: C48.1 D4.1 R31.2 U8.10
NetC50_1: C50.1 R31.1 R32.2 SW1.2
NetC56_1: C56.1 C57.1 R35.2 U10.13
NetC58_1: C58.1 U11.6
NetC58_2: C58.2 L6.1 U11.5
NetF1_2: F1.2 L2.1
NetJ7_1: J7.1 R38.2
NetL3_2: L3.2 L4.1 R20.1
NetQ1_5-6-7-8: Q1.5-6-7-8 Q3.5-6-7-8 XF1.3 XF1.4
NetQ5_1: Q5.1 R28.2 R30.2
NetR3_5V_REG_0_1: R3_5V_REG_0.1 U1_5V_REG_0.5 | length 3.4
  Top Layer w0.254: R3_5V_REG_0.1@120.15,35 120.15,35.075 120.77,35.695 U1_5V_REG_0.5@120.77,38.15
NetR3_5V_REG_1_1: R3_5V_REG_1.1 U1_5V_REG_1.5 | length 3.4
  Top Layer w0.254: R3_5V_REG_1.1@120.15,56 120.15,56.075 120.77,56.695 U1_5V_REG_1.5@120.77,59.15
NetR4_5V_REG_0_1: R4_5V_REG_0.1 R5_5V_REG_0.2 U10.4 | length 1.5
  Top Layer w0.2: R5_5V_REG_0.2@83.4,52.5 R4_5V_REG_0.1@84.85,52.5
NetR4_5V_REG_1_1: R4_5V_REG_1.1 R5_5V_REG_1.2 U10.6 | length 1.5
  Top Layer w0.2: R5_5V_REG_1.2@83.4,73.5 R4_5V_REG_1.1@84.85,73.5
NetR8_2: R8.2 U3.26 | length 6.5
  Top Layer w0.2: R8.2@33,79 35.5,76.5 36.975,76.5 37.75,75.725 U3.26@37.75,75.375
NetR9_2: R9.2 U3.28 | length 4.3
  Top Layer w0.2: R9.2@33,76.5 33.948,75.552 36.727,75.552 36.75,75.529 U3.28@36.75,75.375
NetR11_2: R11.2 U3.27 | length 5.4
  Top Layer w0.2: R11.2@33,77.75 33.75,77.75 35.302,76.198 36.777,76.198 37.25,75.725 U3.27@37.25,75.375
NetR12_2: R12.2 U3.29 | length 3.3
  Top Layer w0.2: R12.2@33,75.25 35.625,75.25 U3.29@36.125,74.75
NetR27_1: R27.1 R29.2 U10.9
NetR32_1: R32.1 U8.9
NetR36_1: R36.1 R37.2 U10.8
NetU2_5V_REG_0_6: U2_5V_REG_0.6
NetU2_5V_REG_0_7: U2_5V_REG_0.7 U10.5
NetU2_5V_REG_1_6: U2_5V_REG_1.6
NetU2_5V_REG_1_7: U2_5V_REG_1.7 U10.7
NetU7_6: U7.6
NetU7_7: U7.7 U10.10
NetU10_11: U10.11
PoC_A: C17.2 D2.1 D2.10 J1.1 L4.2 | length 36.1
  Top Layer w0.2: C17.2@38.75,79.229 38.75,81.385 L4.2@38.635,81.5 38.635,83.635 49,94 D2.1@57.082,94 D2.10@57.917,94 J1.1@66,94
PoC_PWR: C2_5V_REG_0.2 C2_5V_REG_1.2 C3_5V_REG_0.2 C3_5V_REG_1.2 C4_5V_REG_0.2 C4_5V_REG_1.2 C5_5V_REG_0.2 C5_5V_REG_1.2 C53.1 C59.2 F1.1 J4.7 J4.8 J5.7 J5.8 R27.2 U1_5V_REG_0.2 U1_5V_REG_1.2 U7.3 U7.4 U9.3 U11.2 U11.3 | length 28.2
  Top Layer w3: J5.7@105.25,80.525 J5.8@107.75,80.525 109.475,80.525 110.998,79.002 112.5,77.5 128.029,77.5 130.948,80.419
PRE_CAN_N: L5.3 U8.12
PRE_CAN_P: L5.2 U8.13
PRE_SHUNT: Q2.5-6-7-8 Q4.5-6-7-8 U7.1 U7.2
PRE_VCC: D3.1 D4.2 Q1.1 Q1.2 Q1.3 Q2.1 Q2.2 Q2.3 Q3.1 Q3.2 Q3.3 Q4.1 Q4.2 Q4.3 R26.2 | length 9.7
  Top Layer w0.2: Q2.1@152.41,77.025 152.335,77.025 151.048,75.738 151.048,74 151.36,73.688 153.904,73.688 154.715,74.5 D3.1@156.635,74.5
PWR_MOSFET: Q2.4 Q4.4 Q5.3 R26.1 | length 4.5
  Top Layer w0.2: Q2.4@152.41,78.975 152.335,78.975 151.958,79.352 151.958,82.598 152.335,82.975 Q4.4@152.41,82.975
RAW_PWR: J3.16 J3.17 XF1.1 XF1.2
REG_EN_5V_REG_0: R2_5V_REG_0.1 U1_5V_REG_0.7 | length 3.2
  Top Layer w0.254: R2_5V_REG_0.1@123.15,35 123.15,37.99 U1_5V_REG_0.7@123.31,38.15
REG_EN_5V_REG_1: R2_5V_REG_1.1 U1_5V_REG_1.7 | length 3.2
  Top Layer w0.254: R2_5V_REG_1.1@123.15,56 123.15,58.99 U1_5V_REG_1.7@123.31,59.15
RL+: J3.5 J5.4 | length 8.7
  Top Layer w2: J5.4@97.75,80.525 97.75,80.75 100.5,83.5 100.9,83.5 J3.5@103.876,86.476
RL-: J3.6 J5.3 | length 7.9
  Top Layer w2: J5.3@95.25,80.525 95.25,81.85 J3.6@99.876,86.476
RP_MOS_LINK: D3.2 Q1.4 Q3.4 R25.2 | length 9
  Top Layer w0.2: R25.2@151.65,74.5 D3.2@153.365,74.5 153.365,74.655 154.09,75.38 Q1.4@154.09,77.025 154.165,77.025 154.542,77.402 154.542,80.648 154.165,81.025 Q3.4@154.09,81.025
RPI_3V3: C37.2 C38.2 J2.15 U3.24 | length 1.3
  Top Layer w0.3: v2(38.25,76.5) 38.25,76.46 38.75,75.96 U3.24@38.75,75.375
RR+: J3.7 J5.2 | length 7.4
  Top Layer w2: J5.2@92.75,80.525 92.75,83.174 96,86.424 J3.7@96,86.6
RR-: J3.8 J5.1 | length 6.8
  Top Layer w2: J5.1@90.25,80.525 90.25,84.674 92,86.424 J3.8@92,86.6
SIOA_N: C18.1 U3.22 | length 3.3
  Top Layer w0.2: U3.22@39.75,75.375 39.75,75.739 39.651,75.838 39.651,77.897 39.768,78.014 40.014,78.014 40.25,78.25 C18.1@40.25,78.271
SIOA_P: C17.1 U3.23 | length 3.3
  Top Layer w0.2: C17.1@38.75,78.271 38.75,78.25 38.986,78.014 39.232,78.014 39.349,77.897 39.349,75.838 39.25,75.739 U3.23@39.25,75.375
TCAN1146_5V: C46.1 C52.2 U8.3 U9.1
TERM_CAP: C54.2 R33.1 R34.2
USB_5V: F2.1 J3.20 R38.1
USB_D_N: J3.23 J7.4
USB_D_P: J3.22 J7.3
X20_N: C44.1 R24.2 U6.5 Y2.3
X20_P: C43.1 R24.1 U6.6 Y2.1
X25_N: C20.2 U3.16 Y1.3 | length 8.6
  Top Layer w0.2: U3.16@42.75,75.375 42.75,75.739 42.849,75.838 42.849,77.722 42.709,77.862 42.709,79.732 43.003,80.026 43.397,80.026 43.514,80.143 43.514,80.285 C20.2@43.75,80.521 43.986,80.285 43.986,80.143 44.103,80.026 44.514,80.026 44.592,80.103 44.897,80.103 45.014,80.22 45.014,80.714 Y1.3@45.4,81.1
X25_P: C19.2 U3.15 Y1.1 | length 9.5
  Top Layer w0.2: U3.15@43.25,75.375 43.25,75.739 43.151,75.838 43.151,77.847 43.01,77.987 43.01,79.607 43.127,79.724 43.397,79.724 43.514,79.607 43.514,79.465 C19.2@43.75,79.229 43.986,79.465 43.986,79.607 44.103,79.724 44.639,79.724 44.716,79.802 45.022,79.802 45.027,79.807 46.293,79.807 47.1,79 Y1.1@47.1,78.9
XRES: R10.2 U3.17 | length 2.8
  Top Layer w0.2: R10.2@42,78.1 42.25,77.85 U3.17@42.25,75.375
pads on no net: D2.2 D2.4 D2.5 D2.6 D2.7 D2.9 J2.12 J3. P1.1 P1.3 P1.5 P1.7 P1.8 P1.10 P1.11 P1.13 P1.15 P1.16 P1.17 P1.18 P1.22 P1.28 P1.32 P1.36 P1.37 U3.1 U3.2 U3.3 U3.5 U3.6 U3.9 U3.10 U3.12 U3.13 U3.14 U3.18 U3.19 U3.33 U3.34 U3.37 U3.38 U3.41 U3.42 U3.43 U3.44 U3.45 U3.46 U3.47 U3.48 U3.49 U3.50 U3.51 U3.52 U3.53 U3.54 U6.3

## Polygon pours and split planes (outlines as drawn)
PoC_PWR on Top Layer "POC_PWR_L01_P008" (solid, remove dead copper, pour order 8): 135.5,47.5 135,47.5 135,40 143,40 143,80 145.5,80 145.5,84 128,84 128,77 135.5,77 135.5,68.5 135,68.5 135,61 135.5,61
PRE_VCC on Top Layer "PRE_VCC_L01_P005" (solid, remove dead copper, pour order 5): 152.16,82.5 152.66,82.5 153.31,83.15 154.34,83.15 154.34,81.25 153.84,81.25 153.84,80.75 154.34,80.75 154.34,77.5 153.84,77.5 153.19,76.85 152.16,76.85 152.16,78.75 152.66,78.75 152.66,79.25 152.16,79.25
PRE_SHUNT on Top Layer "PRE_SHUNT_L01_P004" (solid, remove dead copper, pour order 4): 145.5,80 145.5,84 152,84 152,76.25 148.75,76.25 148.75,80
NetQ1_5-6-7-8 on Top Layer "NETQ1_5-6-7-8_L01_P007" (solid, remove dead copper, pour order 7): 151,92.5 160,92.5 160,76 154.5,76 154.5,84 151,84
RAW_PWR on Top Layer "RAW_PWR_L01_P006" (solid, remove dead copper, pour order 6): 114,92.5 114,100 145,100 145,85 128,85 128,92.5
PoC_PWR on Top Layer "POC_PWR_L01_P000" (solid, remove dead copper, pour order 0): 125,47.5 135,47.5 135,40 117.75,40 117.75,36.5 116.25,36.5 116.25,43.5 125,43.5
NetC1_5V_REG_0_2 on Top Layer "NETC1_5V_REG_0_2_L01_P001" (solid, remove dead copper, pour order 1): 116.25,36.5 116.25,43.5 114,43.5 114,45.5 106,45.5 106,35.5 113,35.5 113,36.5
5V_FB_5V_REG_0 on Top Layer "5V_FB_5V_REG_0_L01_P002" (solid, remove dead copper, pour order 2): 114,45.5 114,54.5 102.25,54.5 102.25,49 85.5,49 85.5,38.75 96,38.75 96,42 106,42 106,45.5
5VA on Top Layer "5VA_L01_P003" (solid, remove dead copper, pour order 3): 85.5,49 90.5,49 90.5,53.5 85.5,53.5
5VB on Top Layer "5VB_L01_P003" (solid, remove dead copper, pour order 3): 85.5,70 90.5,70 90.5,74.5 85.5,74.5
5V_FB_5V_REG_1 on Top Layer "5V_FB_5V_REG_1_L01_P002" (solid, remove dead copper, pour order 2): 114,66.5 114,75.5 102.25,75.5 102.25,70 85.5,70 85.5,59.75 96,59.75 96,63 106,63 106,66.5
NetC1_5V_REG_1_2 on Top Layer "NETC1_5V_REG_1_2_L01_P001" (solid, remove dead copper, pour order 1): 116.25,57.5 116.25,64.5 114,64.5 114,66.5 106,66.5 106,56.5 113,56.5 113,57.5
PoC_PWR on Top Layer "POC_PWR_L01_P000" (solid, remove dead copper, pour order 0): 125,68.5 135,68.5 135,61 117.75,61 117.75,57.5 116.25,57.5 116.25,64.5 125,64.5

## Silkscreen, mask and mechanical layers (free items; w line width, h text height)
Mechanical 1:
  the board outline again, w0.15

## Text inside footprints (layer, text, board x,y; h text height)
U8: Top 3D Body "*" at 281.991,209.2 h1.27 r180; Top Overlay "*" at 283.115,208.322 h1.27 r180